# EAGLE board WattMeter_v4 (EAGLE 8.6.0)
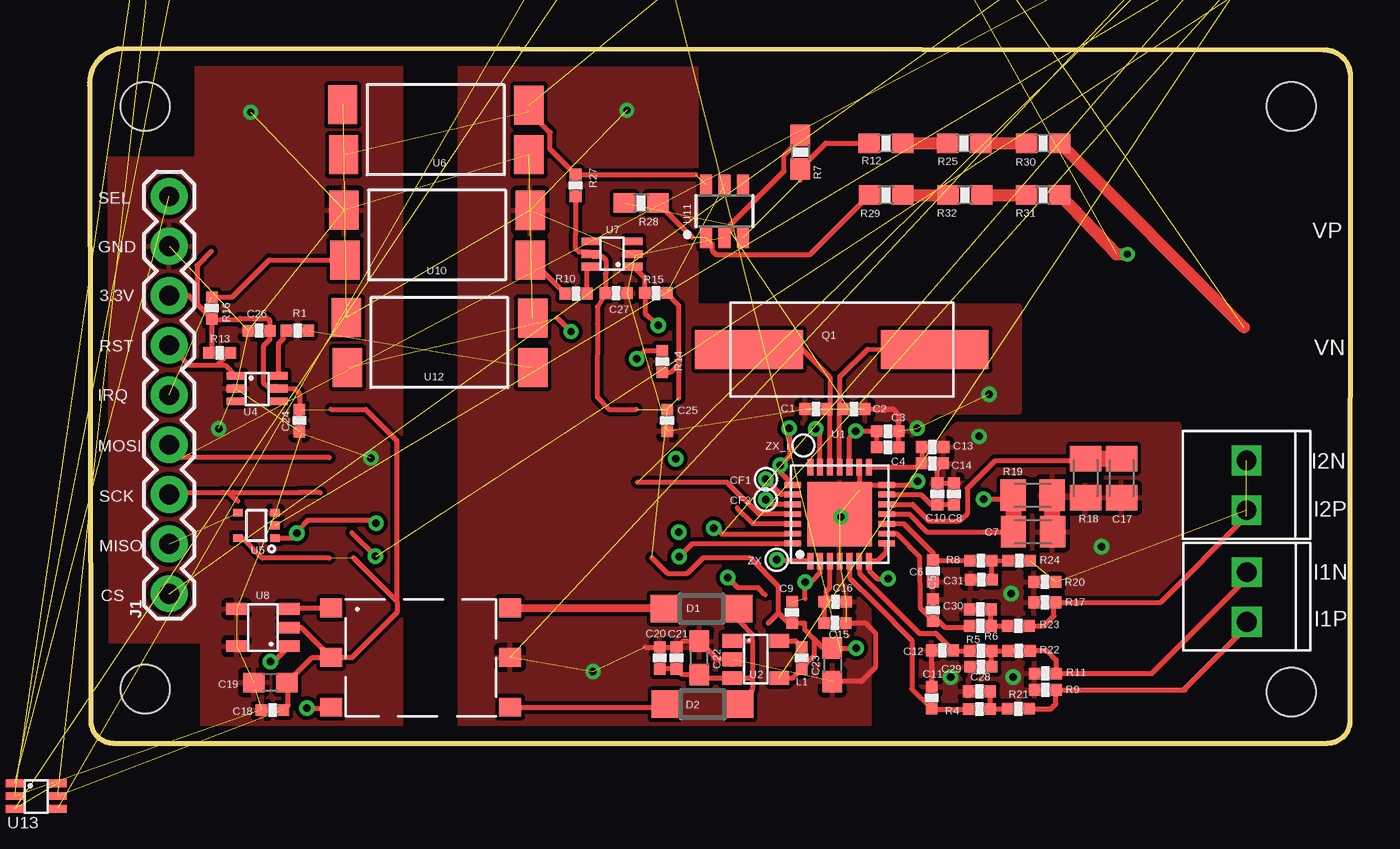
[diagram p0: board, top side]
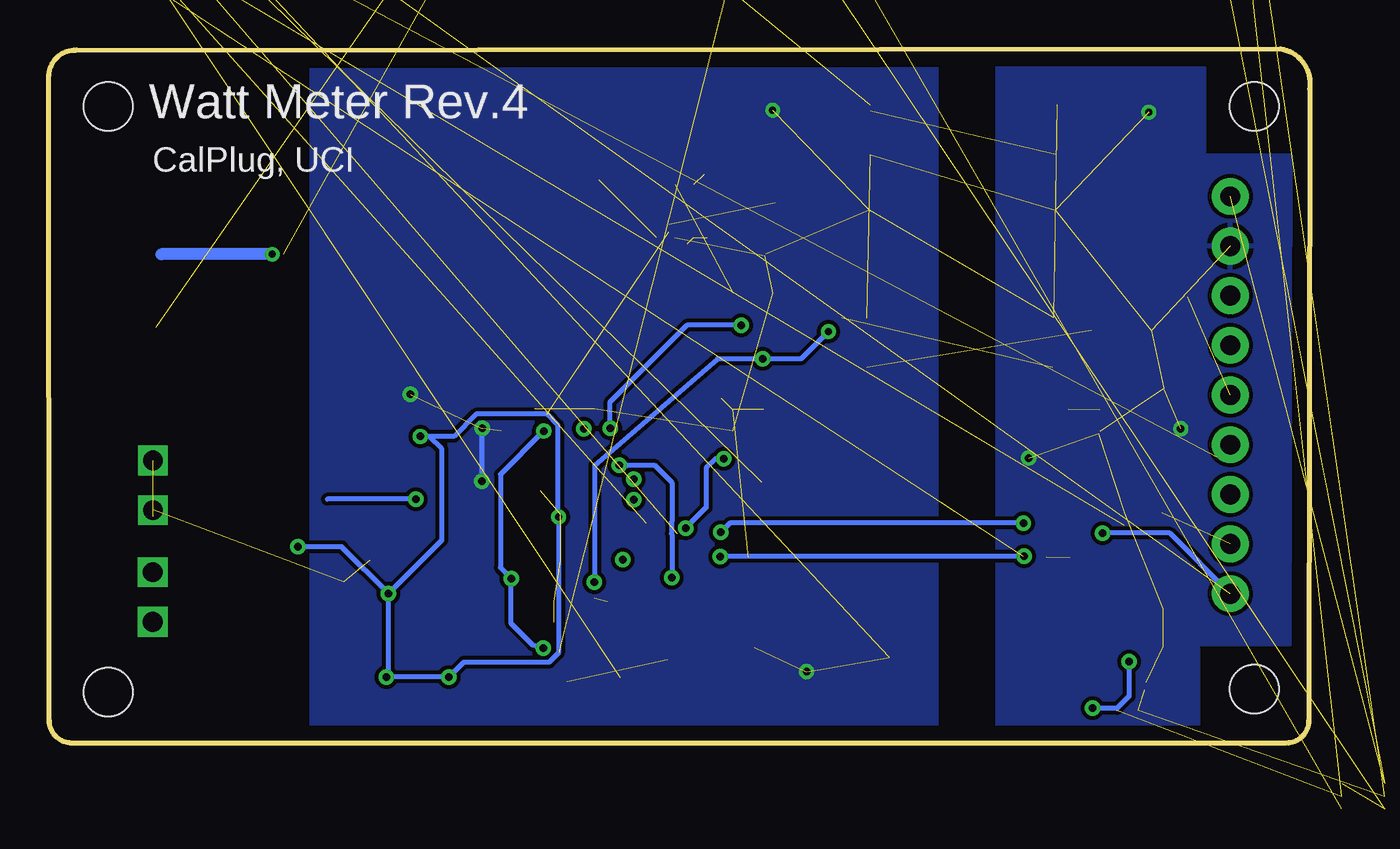
[diagram p1: board, bottom side, seen from below]

Size 64.47 x 35.5 mm. Coordinates in mm from the lower left corner, seen from the top.
Outline: 1.21,0 63.29,0 arc90 64.45,1.16 64.47,34.15 arc90 63.07,35.44 1.5,35.5 arc90 0.02,33.46 0.06,1.15 arc90 1.21,0
Copper layers (1*16): Top 0.035mm / dielectric 1.5mm / Bottom 0.035mm
Design rules "default *": minimum track width 10mil, minimum drill 15mil, track to track 8mil, track to pad 8mil, pad to pad 8mil, via to via 8mil, smd to smd 8mil, copper to edge 30mil, drill to drill 8mil, minimum pad ring 10mil, minimum via ring 8mil, stop-mask expansion 4mil, vias tented up to drill 0mil, thermal gap 10mil
Net classes: 0 default: clearance 0.205 mm; 1 HIGHVOLTAGE: width 0.254 mm, drill 0.508 mm, clearance 2.413 mm to class 0, clearance 0.152 mm; 2 ic: width 0.152 mm, drill 0.305 mm, clearance 0.205 mm to class 0, clearance 2.413 mm to class 1, clearance 0.205 mm
Holes 2.5 mm at 2.85,32.56 2.85,2.76 61.43,32.56 61.43,2.61

## Footprints (pad centres in the part's own frame; a part is rotated, then mirrored left to right if it is on the bottom)
0402-CAP = smd 0.6 x 0.6: 1 -0.55,0; 2 0.55,0
C0805K = smd 1.3 x 1.6: 1 -1,0; 2 1,0
C0603 = smd 1.1 x 1: 1 -0.85,0; 2 0.85,0
SOD123 = smd 1.4 x 1.4: A 1.9,0; C -1.9,0
1X09 = drill 1.016 pad 1.88: 1 0,0; 2 2.54,0; 3 5.08,0; 4 7.62,0; 5 10.16,0; 6 12.7,0; 7 15.24,0; 8 17.78,0; 9 20.32,0
SCREWTERMINAL-5MM-3 = drill 1.3 pad 2.413 square: 1 0,0 | drill 1.3 pad 2.413: 2 5,0; 3 10,0
04C = drill 0.813 pad 1.905 octagon: 1 -1.905,0; 2 1.905,0; 3 5.715,0
1X02_2.54_SCREWTERM = drill 1.016 square: P1 2.54,0; P2 0,0
0402-RES = smd 0.6 x 0.6: 1 -0.55,0; 2 0.55,0
HC-49S = smd 5.5 x 2: 1 -4.75,0; 2 4.75,0
0603-RES = smd 1.1 x 1: 1 -0.85,0; 2 0.85,0
C0805K@1 = smd 1.3 x 1.6: 1 -1,0; 2 1,0
28-WFQFN = smd 0.85 x 0.3: 1 -2.4,1.5; 2 -2.4,1; 3 -2.4,0.5; 4 -2.4,0; 5 -2.4,-0.5; 6 -2.4,-1; 7 -2.4,-1.5; 15 2.4,-1.5; 16 2.4,-1; 17 2.4,-0.5; 18 2.4,0; 19 2.4,0.5; 20 2.4,1; 21 2.4,1.5 | smd 0.3 x 0.85: 8 -1.5,-2.4; 9 -1,-2.4; 10 -0.5,-2.4; 11 0,-2.4; 12 0.5,-2.4; 13 1,-2.4; 14 1.5,-2.4; 22 1.5,2.4; 23 1,2.4; 24 0.5,2.4; 25 0,2.4; 26 -0.5,2.4; 27 -1,2.4; 28 -1.5,2.4 | smd 3.3 x 3.3: PAD 0,0
TSOT25 = smd 0.7 x 1: 1 0,0; 2 0.95,0; 3 1.9,0; 4 1.9,2.4; 5 0,2.4
16-SOIC = smd 1.65 x 0.6: 1 0,8.89; 2 0,7.62; 3 0,6.35; 4 0,5.08; 5 0,3.81; 6 0,2.54; 7 0,1.27; 8 0,0; 9 9.75,0; 10 9.75,1.27; 11 9.75,2.54; 12 9.75,3.81; 13 9.75,5.08; 14 9.75,6.35; 15 9.75,7.62; 16 9.75,8.89
DCKT = smd 0.9 x 0.4: 1 0,1.3; 2 0,0.65; 3 0,0; 4 2.2,0; 5 2.2,0.65; 6 2.2,1.3
NL17SZ125 = smd 0.5 x 0.4: 1 0,1.3; 2 0,0.65; 3 0,0; 4 1.9,0; 5 1.9,1.3
PS2505 = smd 1.5 x 2: 1 0.381,3.575; 2 0.381,1.035; 3 9.906,1.016; 4 9.854,3.575
SOT-23-5 = smd 0.6 x 1.05: 1 0,0; 2 0.95,0; 3 1.9,0; 4 1.9,2.7; 5 0,2.7
TRANSFO_3.3 = smd 1.12 x 0.96: 1 0,5.08; 2 0,2.54; 3 0,0; 4 9.14,0; 5 9.14,2.54; 6 9.14,5.08
SOT-23-6 = smd 1.05 x 0.6: 1 -1.35,0.95; 2 -1.35,0; 3 -1.35,-0.95; 4 1.35,-0.95; 5 1.35,0; 6 1.35,0.95

## Placement (x,y rotation side)
C1  20p  [0402-CAP]  37.14,17.09 0 top
C2  20p  [0402-CAP]  39.08,17.09 180 top
C3  4.7u  [0402-CAP]  40.81,15.95 180 top
C4  0.1u  [0402-CAP]  40.81,15.13 180 top
C5  33n  [0402-CAP]  43.12,6.8 270 top
C6  33n  [0402-CAP]  43.12,8.8 270 top
C7  0.033uF  [C0805K]  48.23,10.81 0 top
C8  0.1u  [0402-CAP]  44.19,12.74 90 top
C9  1u  [0402-CAP]  35.92,6.68 270 top
C10  4.7u  [0402-CAP]  43.34,12.74 90 top
C11  33n  [0402-CAP]  43.05,2.32 270 top
C12  33n  [0402-CAP]  43.6,4.74 180 top
C13  4.7u  [0402-CAP]  43.1,15.14 180 top
C14  0.1u  [0402-CAP]  43.1,14.31 180 top
C15  4.7u  [0402-CAP]  38.11,6.14 180 top
C16  0.1u  [0402-CAP]  38.13,7.23 180 top
C17  0.033uF  [C0805K]  52.76,13.55 270 top
C18  0.1u  [0402-CAP]  9.35,1.69 0 top
C19  10uF TANT  [C0603]  9.25,3.1 180 top
C20  0.1u  [0402-CAP]  29.15,4.35 270 top
C21  1u  [0402-CAP]  30.01,4.35 270 top
C22  10uF  [C0603]  31.18,4.36 90 top
C23  10uF  [C0603]  37.97,4 270 top
C24  0.1u  [0402-CAP]  10.73,16.49 270 top
C25  0.1u  [0402-CAP]  29.53,16.5 90 top
C26  0.1u  [0402-CAP]  8.67,21.09 180 top
C27  0.1u  [0402-CAP]  26.92,23.01 0 top
C28  33n  [0402-CAP]  45.49,2.65 0 top
C29  33n  [0402-CAP]  45.57,3.91 180 top
C30  33n  [0402-CAP]  45.54,6.84 0 top
C31  33n  [0402-CAP]  45.6,8.36 180 top
C32  0.1u  [0402-CAP]  5.23,59.33 90 top  (outside the outline)
D1  MBR0520LT  [SOD123]  31.29,6.88 180 top
D2  MBR0520LT  [SOD123]  31.34,1.99 180 top
J1  [1X09]  4.07,7.64 90 top
J2  [SCREWTERMINAL-5MM-3]  21.88,69.81 90 top  (outside the outline)
J3  [04C]  43.47,69.17 90 top  (outside the outline)
JP3  [1X02_2.54_SCREWTERM]  59.17,8.74 270 top
JP4  [1X02_2.54_SCREWTERM]  59.15,14.45 270 top
L1  15nH  [0402-RES]  36.41,4.35 270 top
Q1  QUARTZ_3.58M_2PIN  [HC-49S]  38.46,20.12 0 top
R1  560  [0402-RES]  10.63,21.1 180 top
R2  560  [0402-RES]  54.28,59.33 90 top  (outside the outline)
R3  4.7k  [0402-RES]  57.21,59.33 90 top  (outside the outline)
R4  1k  [0402-RES]  45.49,1.74 180 top
R5  1k  [0402-RES]  45.56,4.72 180 top
R6  1k  [0402-RES]  45.54,6 180 top
R7  4.7k  [0603-RES]  36.34,30.22 270 top
R8  1k  [0402-RES]  45.57,9.33 180 top
R9  51  [0402-RES]  48.86,2.72 0 top
R10  560  [0402-RES]  24.87,22.99 0 top
R11  51  [0402-RES]  48.86,3.56 180 top
R12  55k  [0603-RES]  40.71,30.67 180 top
R13  4.7k  [0402-RES]  6.65,19.96 180 top
R14  4.7K  [0402-RES]  29.28,19.51 270 top
R15  4.7k  [0402-RES]  28.95,23.02 0 top
R16  4.7k  [0402-RES]  6.25,22.25 270 top
R17  51  [0402-RES]  48.84,7.2 0 top
R18  1K  [C0805K@1]  50.92,13.55 270 top
R19  1k  [C0805K@1]  48.22,12.67 0 top
R20  51  [0402-RES]  48.84,8.24 180 top
R21  100  [0402-RES]  47.48,1.76 180 top
R22  100  [0402-RES]  47.52,4.72 180 top
R23  100  [0402-RES]  47.49,6 180 top
R24  100  [0402-RES]  47.53,9.33 180 top
R25  100k  [0603-RES]  44.71,30.67 180 top
R27  4.7k  [0402-RES]  24.84,28.52 270 top
R28  4.7k  [0603-RES]  28.2,27.62 180 top
R29  55k  [0603-RES]  40.73,28.03 180 top
R30  100k  [0603-RES]  48.75,30.67 180 top
R31  100k  [0603-RES]  48.75,28.03 180 top
R32  100k  [0603-RES]  44.75,28.03 180 top
R34  4.7k  [0402-RES]  8.16,59.33 90 top  (outside the outline)
U1  ADE7953  [28-WFQFN]  38.35,11.71 90 top
U2  PAM2305  [TSOT25]  32.85,5.23 270 top
U3  ISO7241  [16-SOIC]  83.64,53.05 90 top  (outside the outline)
U4  SN74LVC  [DCKT]  7.47,17.48 0 top
U5  NL17SZ125  [NL17SZ125]  9.48,11.78 180 top
U6  PS2505  [PS2505]  22.85,33.66 180 top
U7  SN74LVC  [DCKT]  27.81,25.66 180 top
U8  SN6501  [SOT-23-5]  10.21,4.96 90 top
U9  TRANSFO_3.3  [TRANSFO_3.3]  12.35,1.84 0 top
U10  PS2505  [PS2505]  22.92,28.28 180 top
U11  SN74LVC1G3157DBVR  [SOT-23-6]  32.46,27.2 90 top
U12  PS2505  [PS2505]  23.04,22.78 180 top
U13  SN74LVC  [DCKT]  -3.83,-3.36 0 top

## Library data of the parts
C1-C6 C8-C16 C18 C20 C21 C24-C32 L1 R1-R6 R8-R11 R13-R17 R20-R24 R27 R34 = Nizanlib
C7 C17 C19 C22 C23 R18 R19 = resistor
D1 D2 = diode
J1 JP3 JP4 = SparkFun-Connectors
J2 = SparkFun-Connectors; PROD_ID: CONN-10134; SF_SKU: PRT-08433
J3 = jumper
Q1 = CalPlug; DIGIKEY: http://www.digikey.com/product-detail/en/txc-corporation/9C-3.579545MBBK-T/887-2450-1-ND/4475440
R7 R12 R25 R28-R32 = SparkFun
U1 U8 = CalPlug
U2 = Damien_regulator
U3 U5 U6 U10 U12 = wattmeter
U4 = Damien_divers; SPICEPREFIX: X
U7 U13 = Damien_divers
U9 = Damien_power
U11 = TI

## Nets
AGND: C5.1 C6.2 C7.2 C8.2 C10.2 C11.1 C12.2 C13.1 C14.1 C17.2 C28.1 C29.2 C30.1 C31.2 J2.1 R7.1 R9.1 R11.2 R17.1 R18.2 R19.2 R20.2 R28.2 U1.16
CF1: U1.23
CF2: U1.24
CS: J1.1 U3.11 U5.1
CS_ISO: U1.28 U3.6
GND: C18.1 C19.2 C24.2 C26.2 C32.2 J1.8 R3.1 U3.2 U3.8 U4.2 U5.3 U6.1 U8.4 U8.5 U10.3 U12.2 U13.2
GNDI: C1.1 C2.1 C3.1 C4.1 C15.1 C16.1 C20.1 C21.1 C22.2 C23.2 C25.1 C27.2 U1.4 U1.14 U1.PAD U2.2 U3.9 U3.15 U6.3 U7.2 U9.5 U10.2 U11.2 U12.3
I1N: JP3.P2 R11.1 R22.1
I1P: JP3.P1 R9.2 R21.1
I2N: JP4.P1 R20.1 R24.1
I2P: JP4.P2 R17.2 R23.1
IRQ_ISO: R15.1 U1.22 U7.1
IRQ_OUT: J1.5 R16.1 U10.4
LNV1: J2.2 R30.1
LNV2: J2.3 R31.1
MISO: U3.5 U5.2
MISO_ISO: U1.26 U3.12
MISO_OUT: J1.2 U5.4
MOSI: J1.4 U3.3
MOSI_ISO: U1.27 U3.14
N$1: C1.2 Q1.1 U1.19
N$2: C2.2 Q1.2 U1.18
N$3 [ic]: C7.1 R19.1 U1.11
N$4: L1.1 U2.5
N$7: C8.1 C10.1 U1.13
N$8: C13.2 C14.2 U1.15
N$10: C12.1 R5.2 U1.6
N$11: C11.2 R4.2 U1.5
N$12: C15.2 C16.2 U1.3
N$13: R31.2 R32.1
N$17: J3.3 U13.4
N$18: D1.A U9.6
N$19: C20.2 C21.2 C22.1 D1.C D2.C U2.1 U2.3
N$20: D2.A U9.4
N$21: U8.3 U9.1
N$22: R29.1 R32.2
N$23: U8.1 U9.3
N$24: C28.2 R4.1 R21.2
N$25: R1.1 U12.1
N$26: R1.2 U4.6
N$27: C29.1 R5.1 R22.2
N$28: C6.1 R8.2 U1.10
N$30: R10.2 U7.6
N$32: C5.2 R6.2 U1.9
N$33: C30.2 R6.1 R23.2
N$34: C31.1 R8.1 R24.2
N$35: R25.1 R30.2
N$36: R12.1 R25.2
N$37: R28.1 R29.2 U11.1
N$38: R7.2 R12.2 U11.3
N$39: R10.1 U10.1
N$40: J3.1 R3.2 U13.3 U13.6
N$42: J3.2 R2.2
N$43: R2.1 U6.2
RESET: J1.6 R13.1 U4.1
RESET_ISO: C9.1 R14.1 U1.2 U12.4
REVP: U1.20
SCK: J1.3
SCK_ISO: U1.25 U3.13
SELECT: J1.9 R34.1 U13.1
SETPHASE: R27.1 U6.4 U11.6
V2P [ic]: C17.1 R18.1 U1.12
VCC: C3.2 C4.2 C9.2 C23.1 C25.2 C27.1 L1.2 R14.2 R15.2 R27.2 U1.7 U1.8 U1.17 U2.4 U3.10 U3.16 U7.5 U11.5
VDD: C18.2 C19.1 C24.1 C26.1 C32.1 J1.7 R13.2 R16.2 R34.2 U3.1 U3.7 U4.5 U5.5 U8.2 U9.2 U13.5
VP_IN: U11.4
ZX: U1.1
ZX_I: U1.21

## Tracks (layer width: path | path; a pad name or v marks a point on that pad's centre or on a via)
AGND  (via drill 0.35, 0.38)  (3 unrouted)
  Top 0.254: 50.8,12.67 R18.2 | C12.2 C11.1 | C8.2 C10.2 43.34,14 C14.1 | 39.33,14.09 U1.16 39.35,12.3 v38.42,11.57 | 32.78,26.17 32.78,26.51 35.51,29.24 35.51,30.06 36.34,30.89 R7.1
  Top 0.813: R19.2 C7.2
  Bottom 0.254: v47.11,7.65 49.5,10.04 v51.73,10.04 | v47.11,7.65 44.37,10.39 44.37,15.03 45.02,15.68 v45.49,15.68 43.76,15.68 42.62,16.82 39.01,16.82 38.45,16.26 38.45,11.6 v38.42,11.57 38.42,4.61 38.9,4.13 43.27,4.13 v44.02,3.38 v47.21,3.38 47.11,3.48 v47.11,7.65
  pour Top: 40.5,0.92 40.5,12.47 44.35,16.32 55.65,16.32 55.68,16.29 55.68,1.01 55.59,0.92
CF1  (via drill 0.38)
  Top 0.254: U1.23 35.36,12.71 v34.57,13.49
CF2  (via drill 0.38)
  Top 0.254: U1.24 34.81,12.21 v34.57,12.44
CS  (via drill 0.38)  (1 unrouted)
  Top 0.254: v14.65,11.25 14.59,11.25 14.45,11.39 11.15,11.39 10.96,11.2 10.87,11.09 v10.6,10.74 10.34,10.48 U5.1 | 30.09,10.76 v30.12,10.79
  Bottom 0.254: v30.12,10.79 29.66,11.25 v14.65,11.25 | J1.1 7.17,10.74 v10.6,10.74
CS_ISO  (via drill 0.38)  (1 unrouted)
  Top 0.254: 13.42,10.76 v14.62,9.56 | v30.15,9.54 30.82,10.21 U1.28
  Bottom 0.254: v14.62,9.56 14.64,9.54 v30.15,9.54
GND  (via drill 0.35, 0.38)  (19 unrouted)
  Top 0.254: 10.83,15.84 C24.2 | 8.46,2.72 C19.2
  other vias: 14.38,14.58 6.6,16.08 8.24,32.26
  pour Top: 5.74,0.28 5.74,5.13 5.72,5.15 0.41,5.15 0.41,29.91 0.39,29.93 5.43,29.93 5.45,29.95 5.45,35.11 5.41,35.16 15.91,35.16 15.95,35.11 15.95,0.3 15.93,0.28 15.91,0.26 5.7,0.26
  pour Bottom: 5.68,0.59 5.68,4.99 5.74,5.05 0.47,5.05 0.47,30.05 0.5,30.08 5.37,30.08 5.39,30.05 5.39,35.13 5.37,35.16 15.97,35.16 16.04,35.09 16.04,0.53 16.08,0.49 5.67,0.49 5.65,0.46
GNDI  (via drill 0.35, 0.38)  (20 unrouted)
  Top 0.254: 38.68,6.16 C15.1 39.66,6.14 40.19,5.61 40.19,3.89 39.76,3.46 | C2.1 41.06,17.09 41.36,16.79 C3.1 C4.1 | 29.42,15.84 C25.1 | 28.4,4.9 C20.1 C21.1 30.32,5.21 C22.2 32.11,4.28 U2.2 | 27.88,24.94 U7.2 | 39.76,3.46 | 39.76,3.46 39.45,3.15 C23.2 | 39.67,13.21 39.85,13.21 U1.14 42.15,13.21 v42.33,13.39
  Top 0.305: 39.85,13.21 39.85,12.72 39.7,12.56 39.35,12.91
  Bottom 0.152: v42.33,16.08 v42.32,16.09
  Bottom 0.254: v42.33,13.39 v42.33,16.08
  other vias: 45.98,17.83 25.74,3.65 27.47,32.37
  pour Bottom: 19.1,0.66 19.1,34.66 19.13,34.69 50.99,34.69 51.04,34.74 51.04,0.6 19.22,0.6 19.17,0.66
  pour Top: 18.95,0.61 18.95,34.87 18.93,34.89 30.96,34.89 31.02,34.95 31.02,22.41 31.06,22.37 47.52,22.37 47.53,22.38 47.53,16.93 47.52,16.92 43.19,16.92 39.9,13.62 39.84,13.57 39.84,0.47 18.96,0.47 18.94,0.48
I1N
  Top 0.254: R22.1 48.96,4.72 49.41,4.27 R11.1 54.32,3.56 59.17,8.42 JP3.P2
I1P
  Top 0.254: R9.2 49.41,2.02 49.14,1.75 R21.1 | R9.2 49.45,2.76 | R9.2 55.94,2.72 | 55.94,2.72 56.02,2.72 | 55.94,2.72 59.17,5.96 JP3.P1
I2N  (2 unrouted)
I2P  (1 unrouted)
  Top 0.254: R23.1 48.8,6 49.3,6.5 49.3,7.11 R17.2 54.77,7.2 59.15,11.59
IRQ_ISO  (via drill 0.38)
  Top 0.254: v29.08,21.37 28.4,21.97 R15.1 28.4,23.77 U7.1 | v35.78,16.11 35.78,14.69 v35.3,14.21 35.3,13.86 U1.22 | 34.54,7.59 34.19,7.94 33.15,7.94 v32.62,8.47
  Bottom 0.254: v29.08,21.37 31.86,21.37 35.78,17.45 v35.78,16.11 | v35.3,14.21 34.88,14.21 34.88,14.22 33.52,14.22 32.62,13.32 32.62,11.33 32.65,11.3 32.65,10.7 32.62,10.67 v32.62,8.47
IRQ_OUT  (1 unrouted)
  Top 0.254: 6.22,22.83 R16.1 7.28,22.8 9.19,24.71 U10.4
LNV1  (1 unrouted)
  Top 0.61: R30.1 59.02,21.25
LNV2  (via drill 0.35)  (1 unrouted)
  Top 0.61: R31.1 52.48,25 v53.06,25
  Bottom 0.61: v53.06,25 58.72,25
MISO  (1 unrouted)
MISO_ISO  (1 unrouted)
  Top 0.254: 35.53,11.21 U1.26 35.94,11.22 33.92,11.22 33.11,12.03
MISO_OUT  (1 unrouted)
MOSI  (1 unrouted)
  Top 0.254: 12.26,14.61 4.73,14.61 J1.4
MOSI_ISO  (via drill 0.38)  (1 unrouted)
  Top 0.254: 29.93,14.57 v29.96,14.54 | v31.92,11 31.99,11 32.33,10.69 35.37,10.69 35.39,10.69 35.93,10.69 U1.27
  Bottom 0.254: v29.96,14.54 30.4,14.54 30.87,14.07 30.87,12.05 v31.92,11
N$1
  Top 0.254: 33.31,19.43 Q1.1 36.42,20.14 37.85,18.71 37.85,17.25 C1.2 37.69,17 37.85,16.83 U1.19
N$2
  Top 0.254: 42.85,19.75 Q1.2 39.79,20.14 38.35,18.71 38.35,17.27 C2.2 38.35,16.91 U1.18
N$3  (via drill 0.38)
  Top 0.254: U1.11 41.89,11.71 42.79,10.81 C7.1 | v45.71,12.48 47.03,12.48 R19.1
  Top 0.813: R19.1 C7.1
  Bottom 0.254: v45.71,12.48 50.23,12.48
N$4
  Top 0.254: U2.5 36.08,5.23 L1.1
N$7
  Top 0.254: U1.13 42.49,12.71 43.01,12.19 C10.1 C8.1
N$8
  Top 0.254: C13.2 C14.2 42.35,14.11 U1.15
N$10
  Top 0.254: R5.2 44.17,4.72 C12.1 43.27,5.62 42.43,5.62 39.37,8.67 39.37,9.29 U1.6
N$11
  Top 0.254: R4.2 43.09,1.74 C11.2 42.04,2.79 42.04,5.25 40.14,7.16 38.85,8.45 U1.5
N$12
  Top 0.254: U1.3 37.85,7.95 37.66,7.76 37.66,7.31 C16.2 37.56,7.21 C15.2
N$13
  Top 0.254: 47.81,27.97 R31.2
  Top 0.61: R32.1 R31.2
N$17  (1 unrouted)
N$18
  Top 0.406: U9.6 29.39,6.92 D1.A
N$19
  Top 0.254: C22.1 30.3,3.51 C21.2 C20.2 | 31.36,3.33 U2.3 33.75,3.33 33.89,3.47 | D2.C 33.21,1.77 arc-90 33.2,1.78 | 33.19,5.24 arc90 U2.1 33.88,5.23 33.89,5.22 | D2.C 33.26,2.01 | D2.C 33.2,2.03 33.89,2.72 33.89,3.47 | D1.C 33.19,6.24 33.89,5.54 33.89,5.22 | 33.89,5.22 33.89,3.47
  Top 0.406: C22.1 31.36,3.33
N$20
  Top 0.254: U9.4 29.29,1.84 D2.A
N$21
  Top 0.254: U8.3 10.27,6.92 U9.1
N$22
  Top 0.254: R29.1 41.64,27.97
  Top 0.61: R29.1 R32.2
N$23  (via drill 0.38)
  Top 0.254: v11.12,1.79 12.3,1.79 U9.3 | v9.25,4.16 9.41,4.16 U8.1
  Bottom 0.254: v9.25,4.16 9.25,2.38 9.86,1.77 11.1,1.77 v11.12,1.79
N$24
  Top 0.254: R21.2 R4.1 C28.2
N$25  (1 unrouted)
N$26
  Top 0.254: U4.6 9.67,20.43 9.91,20.67 9.91,20.93 R1.2
N$27
  Top 0.254: C29.1 R5.1 R22.2
N$28
  Top 0.254: C6.1 43.14,9.33 R8.2 | U1.10 41.64,11.21 43.12,9.73 C6.1 | 43.12,9.51 C6.1
N$30
  Top 0.254: U7.6 25.42,24.17 R10.2
N$32
  Top 0.254: U1.9 40.77,10.69 41.31,10.69 42.45,9.52 42.49,6.91 43.12,6.28 C5.2 43.41,6.25 43.73,5.93 44.92,5.93 R6.2
N$33
  Top 0.254: C30.2 R6.1 R23.2
N$34
  Top 0.254: C31.1 46.12,8.49 R8.1 R24.2
N$35
  Top 0.254: 47.86,30.6 R30.2
  Top 0.61: R25.1 47.79,30.67 47.86,30.6
N$36
  Top 0.254: R12.1 41.64,30.6
  Top 0.61: R12.1 R25.2
N$37  (2 unrouted)
  Top 0.254: 30.82,25.85 R28.1 | 31.83,25.53 31.83,25.19 32.02,24.99 36.84,24.99 R29.2
N$38  (1 unrouted)
  Top 0.254: R12.2 39.63,30.68 37.65,30.68 R7.2 36.34,28.78
N$39
  Top 0.254: U10.1 22.61,24.71 R10.1
N$40  (3 unrouted)
N$42  (1 unrouted)
N$43  (1 unrouted)
RESET
  Top 0.254: R13.1 7.17,19.96 6.54,19.33 | J1.6 5.08,19.33 6.54,19.33 | 6.54,19.33 6.92,19.33 U4.1
RESET_ISO  (via drill 0.35, 0.38)  (2 unrouted)
  Top 0.254: U1.2 37.35,8.72 36.85,8.22 v36.58,8.22 | v36.58,8.22 v36.57,8.21 | R14.1 28.37,20.06 v27.97,19.66 | 36.58,7.39 v36.58,8.22 | C9.1 | 23.92,21.75 v24.62,21.04
  Bottom 0.254: v36.58,8.22 36.57,14.2 30.3,19.65 | 30.3,19.65 v27.97,19.66 | v24.62,21.04 26.01,19.65 30.3,19.65
REVP  (via drill 0.38)
  Top 0.254: U1.20 37.35,15.84 v37.12,16.07
SCK
  Top 0.254: 11.8,12.81 10.8,12.81 | 10.8,12.81 10.67,12.81 | 6.8,12.82 7.12,12.82 | 7.12,12.82 7.33,12.82 10.79,12.82 10.8,12.81 | 7.58,12.36 7.12,12.82 | J1.3 4.17,12.82 7.12,12.82
SCK_ISO  (1 unrouted)
  Top 0.254: U1.25 34.22,11.71 32.6,13.33 28.01,13.33
SELECT  (2 unrouted)
  Top 0.254: 4.75,27.96 J1.9
SETPHASE  (2 unrouted)
  Top 0.254: 24.77,29.14 R27.1 | R27.1 30.99,29.07 | R27.1 23.55,30.36 23.55,31.22 22.47,32.3
V2P
  Top 0.254: U1.12 42.08,12.21 42.9,11.37 44.48,11.37 44.87,11.73 44.87,13.02 46.29,14.44 50.81,14.44 R18.1
  Top 0.813: R18.1 C17.1
VCC  (via drill 0.38)  (6 unrouted)
  Top 0.254: U1.8 40.71,10.17 40.71,9.75 40.27,9.31 U1.7 | 35.73,6.13 C9.2 | C4.2 C3.2 v39.18,15.96 38.85,15.63 U1.17 | R15.2 30.12,22.38 30.12,19.39 | 30.12,19.39 29.69,18.96 R14.2 | C9.2 36.56,6.13 36.56,5.82 37.04,5.34 | 35.22,6.66 35.22,8.02 33.78,9.46 31.36,9.46 30.58,8.68 29.55,8.68 28.74,9.49 | 35.22,6.66 35.75,6.13 C9.2 | 35.22,6.66 34.69,6.13 | 39.85,9.04 U1.7 | U1.7 39.85,8.84 40.29,8.4 v40.83,8.4 | U2.4 35.94,3.33 L1.2 36.41,3.83 37.04,4.46 37.04,5.34 | 37.04,5.34 37.53,4.85 C23.1 38.93,4.85 v39.2,4.86 | 27.94,17.07 26.57,17.07 25.96,17.68 25.95,17.68 25.95,18.29 25.96,21.43 25.96,22.31 C27.1 26.37,24 26.39,24.02 26.39,24.7 26.2,24.89 25.73,24.89 U7.5 25.49,25.13 25.02,25.13 24.83,25.32 24.83,26 24.84,26.01 R27.2 | 30.12,19.39 30.12,17.64
  Bottom 0.254: v39.18,15.96 41.39,13.75 41.39,8.96 v40.83,8.4 40.83,8.1 40.84,8.09 40.84,6.12 39.73,5.01 v39.2,4.86
VDD  (7 unrouted)
  Top 0.254: 10.75,17.11 C24.1 10.73,17.89 10.49,18.13 U4.5 9.55,18.25 9.08,18.25 8.89,18.44 8.89,20.3 9.22,20.63 C26.1 9.22,21.6 9.1,21.72 7.68,21.72 7.63,21.67 6.25,21.67 | U9.2 13.42,4.38 15.72,6.68 15.72,7.25 | 12.34,17.06 14.12,17.06 15.72,15.46 15.72,7.25 | 12.27,9.47 8.83,9.47 7.82,10.48 U5.5 | 6.25,20.15 6.08,19.98 R13.2 6.25,20.11 6.25,21.67 | 13.48,9.49 15.72,7.25 | 6.23,25.16 5.49,24.42 5.49,22.46 | 5.49,22.46 R16.2 6.25,21.67 | C19.1 10.16,3.16 | 10.16,3.16 11.38,4.38 U9.2 | U9.2 10.82,5.91 U8.2 | C18.2 10.16,1.95 10.16,3.16 | 5.49,22.46 5.07,22.88 J1.7
ZX  (via drill 0.38)
  Top 0.254: U1.1 35.2,9.31 v35.14,9.37

## Text on the board
tPlace: ZX_I | CF1 | CF2 | ZX
tNames: SEL | VP | GND | 3.3V | RST | VN | IRQ | MOSI | I2N | SCK | I2P | MISO | I1N | CS | I1P
bNames: Watt Meter Rev.4 | CalPlug, UCI